# EAGLE board Wifi Schemati (EAGLE 9.2.2)
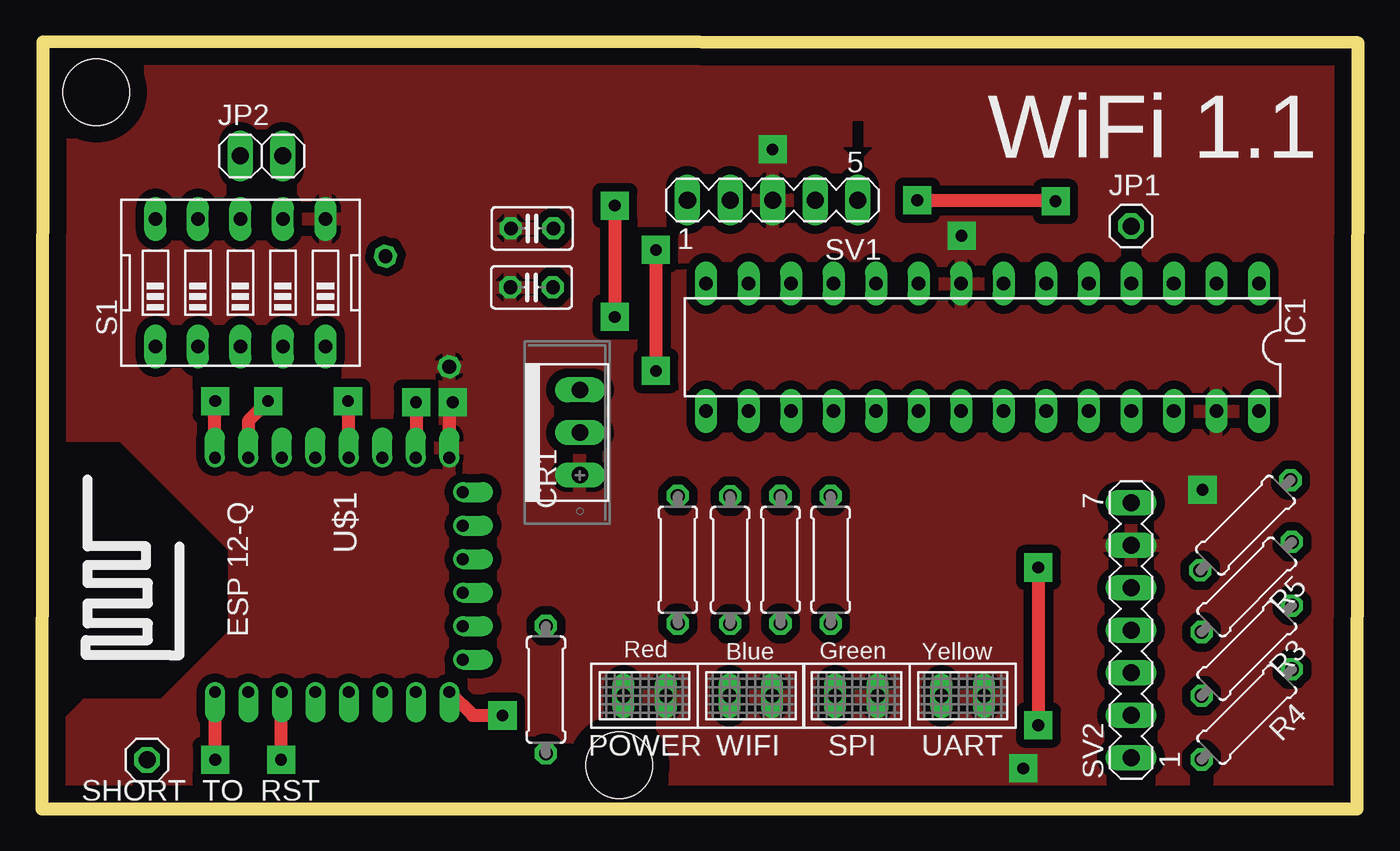
[diagram p0: board, top side]
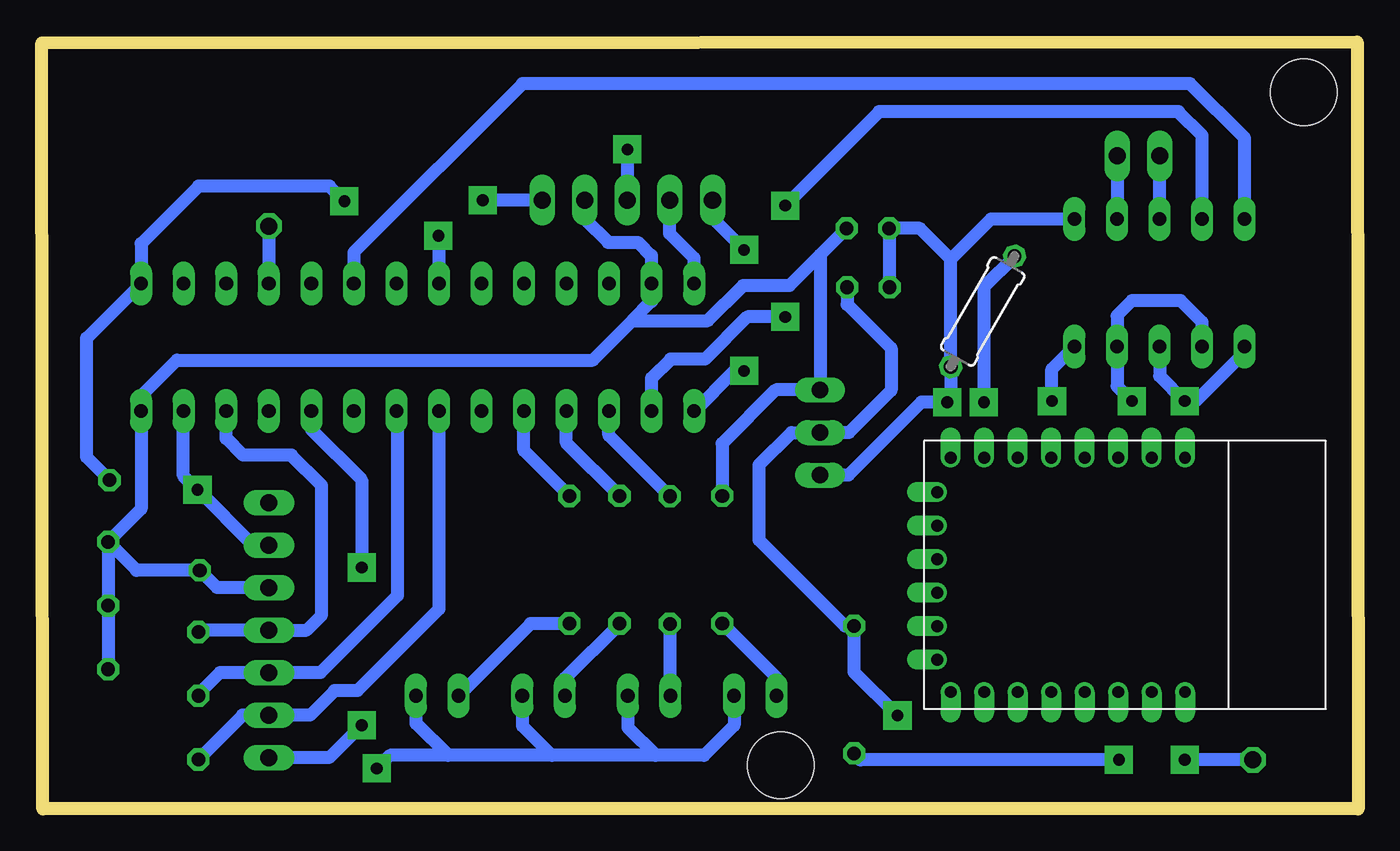
[diagram p1: board, bottom side, seen from below]

Size 78.61 x 45.81 mm. Coordinates in mm from the lower left corner, seen from the top.
Outline: 0,0 78.55,0 78.61,45.75 0.06,45.81 0,0
Copper layers (1*16): Top 0.035mm / dielectric 1.5mm / Bottom 0.035mm
Design rules "default *": minimum track width 10mil, minimum drill 22mm, track to track 20mil, track to pad 20mil, pad to pad 20mil, via to via 20mil, smd to smd 8mil, copper to edge 40mil, drill to drill 8mil, minimum pad ring 10mil, minimum via ring 8mil, stop-mask expansion 4mil, vias tented up to drill 0mil, thermal gap 10mil
Holes 3.97 mm at 3.25,42.81 34.48,2.61

## Footprints (pad centres in the part's own frame; a part is rotated, then mirrored left to right if it is on the bottom)
0207/7 = drill 0.813 octagon: 1 -3.81,0; 2 3.81,0
C025-025X050 = drill 0.813 octagon: 1 -1.27,0; 2 1.27,0
TO-220 = drill 1 long: 1 -5.08,-1.524; 2 -2.54,-1.524; 3 0,-1.524
DIL28-3 = drill 0.813 long: 1 -16.51,-3.81; 2 -13.97,-3.81; 3 -11.43,-3.81; 4 -8.89,-3.81; 5 -6.35,-3.81; 6 -3.81,-3.81; 7 -1.27,-3.81; 8 1.27,-3.81; 9 3.81,-3.81; 10 6.35,-3.81; 11 8.89,-3.81; 12 11.43,-3.81; 13 13.97,-3.81; 14 16.51,-3.81; 15 16.51,3.81; 16 13.97,3.81; 17 11.43,3.81; 18 8.89,3.81; 19 6.35,3.81; 20 3.81,3.81; 21 1.27,3.81; 22 -1.27,3.81; 23 -3.81,3.81; 24 -6.35,3.81; 25 -8.89,3.81; 26 -11.43,3.81; 27 -13.97,3.81; 28 -16.51,3.81
1X01 = drill 1.016 octagon: 1 0,0
1X02 = drill 1.016 long: 1 -1.27,0; 2 1.27,0
U57X32 = drill 0.813 long: A -1.27,0; K 1.27,0
EDG-05 = drill 0.813 long: 1 -5.08,-3.81; 2 -2.54,-3.81; 3 0,-3.81; 4 2.54,-3.81; 5 5.08,-3.81; 6 5.08,3.81; 7 2.54,3.81; 8 0,3.81; 9 -2.54,3.81; 10 -5.08,3.81
MA05-1 = drill 1.016 long: 1 -5.08,0; 2 -2.54,0; 3 0,0; 4 2.54,0; 5 5.08,0
MA07-1 = drill 1.016 long: 1 -7.62,0; 2 -5.08,0; 3 -2.54,0; 4 0,0; 5 2.54,0; 6 5.08,0; 7 7.62,0
ESP12Q = drill 0.7 offset: ADC -7.1,3.8; CH_PD -7.1,1.8; CS0 -5.165,-9.005; GND 6.9,-8.2; GPIO0 6.9,-2.2; GPIO2 6.9,-4.2; GPIO4 6.9,1.8; GPIO5 6.9,-0.2; GPIO9 -1.165,-9.005; GPIO10 0.835,-9.005; GPIO12 -7.1,-4.2; GPIO13 -7.1,-6.2; GPIO14 -7.1,-2.2; GPIO15 6.9,-6.2; GPIO16 -7.1,-0.2; MISO -3.165,-9.005; MOSI 2.835,-9.005; RESET -7.1,5.8; RX 6.9,3.8; SCLK 4.835,-9.005; TX 6.9,5.8; VCC -7.1,-8.2

## Placement (x,y rotation side)
BLUE_WIFI  330  [0207/7]  41.1,14.86 270 top
C1  10uF  [C025-025X050]  29.28,34.67 180 top
C2  10uF  [C025-025X050]  29.25,31.15 0 top
CR1  LD1117V33  [TO-220]  30.61,25.02 90 top
GREEN_SPI  330  [0207/7]  44.11,14.88 270 top
IC1  PIC24FVXXKA302-SP  [DIL28-3]  56.17,27.56 180 top
JP1  [1X01]  65.06,34.81 0 top
JP2  [1X02]  13.12,39 0 top
POWER  U57X32  [U57X32]  36,6.76 0 top
R1  10K  [0207/7]  71.88,16.94 225 top
R2  10K  [0207/7]  22.43,29.71 60 bottom
R3  10K  [0207/7]  71.96,9.45 225 top
R4  10K  [0207/7]  71.96,5.64 225 top
R5  10K  [0207/7]  71.96,13.26 225 top
R6  10K  [0207/7]  30.11,7.12 90 top
RED_POWER  330  [0207/7]  37.98,14.89 90 top
S1  [EDG-05]  11.86,31.42 0 top
SHORT_TO_RST  [1X01]  6.29,2.94 0 top
SPI  U57X32  [U57X32]  48.65,6.76 0 top
SV1  [MA05-1]  43.64,36.35 0 top
SV2  [MA07-1]  65.06,10.68 90 top
U$1  ESP12Q  [ESP12Q]  16.13,14.08 90 top
UART  U57X32  [U57X32]  55,6.76 0 top
WIFI  U57X32  [U57X32]  42.35,6.76 0 top
YELLOW_UART  330  [0207/7]  47.11,14.88 270 top

## Library data of the parts
BLUE_WIFI GREEN_SPI R1-R6 RED_POWER YELLOW_UART = rcl; SPICEPREFIX: R
C1 C2 = rcl; SPICEPREFIX: C
CR1 = 3v3 Regulator; MANUFACTURER_PART_NUMBER: LD1117V33; VENDOR: STMicroelectronics
IC1 = pic24kakl
JP1 JP2 SHORT_TO_RST = pinhead
POWER SPI UART WIFI = led
S1 = special
SV1 SV2 = con-lstb; OC_FARNELL: unknown; OC_NEWARK: unknown
U$1 = esp826612q; SPICEPREFIX: X

## Nets
3.3V: C2.2 CR1.2 R6.2 U$1.VCC
+12V: SV2.7
CLK: IC1.22 R3.2 SV2.3
FLSH_MD: S1.5 U$1.GPIO0
GND: C1.2 C2.1 CR1.1 IC1.8 IC1.27 POWER.K R2.1 S1.6 SPI.K SV1.3 SV2.6 U$1.GND UART.K WIFI.K
MCLR: IC1.1 R1.1 SV1.5
MISO: IC1.24 SV2.1
MOSI: IC1.21 R4.2 SV2.2
N$1: SHORT_TO_RST.1 U$1.RESET
N$2: R2.2 U$1.GPIO15
N$6: R6.1 U$1.CH_PD
N$7: POWER.A RED_POWER.1
N$8: GREEN_SPI.2 SPI.A
N$10: UART.A YELLOW_UART.2
N$11: BLUE_WIFI.2 WIFI.A
PGC: IC1.15 SV1.1
PGD: IC1.14 SV1.2
RX: S1.2 S1.4 U$1.RX
RXPIC: IC1.6 S1.10
RXPROG: JP2.2 S1.7
SPI_LIGHT: GREEN_SPI.1 IC1.18
SS: IC1.26 R5.2 SV2.4
TX: S1.1 S1.3 U$1.TX
TXOUT: IC1.4 JP1.1
TXPIC: IC1.16 S1.9
TXPROG: JP2.1 S1.8
UART_LIGHT: IC1.19 YELLOW_UART.1
VDD: C1.1 CR1.3 IC1.13 IC1.28 R1.2 R3.1 R4.1 R5.1 RED_POWER.2 SV1.4 SV2.5
WIFI_LIGHT: BLUE_WIFI.1 IC1.17

## Tracks (layer width: path | path; a pad name or v marks a point on that pad's centre or on a via)
3.3V  (via drill 0.7 pad 1.68)
  Top 0.762: U$1.VCC 25.73,5.58 v27.51,5.58
  Bottom 0.762: C2.2 30.52,30.13 27.9,27.52 27.9,25 30.42,22.48 CR1.2 33.84,22.48 35.77,20.55 35.77,16.05 30.66,10.93 R6.2 30.11,8.17 v27.51,5.58
CLK
  Bottom 0.762: IC1.22 57.38,23.69 57.38,12.74 61.99,8.14 SV2.3 67.98,8.14 69.27,6.85 R3.2
FLSH_MD  (via drill 0.7 pad 1.68)
  Top 0.762: v18.29,24.35 18.29,21.03 U$1.GPIO0
  Bottom 0.762: v18.29,24.35 18.29,26.27 S1.5
GND  (via drill 0.7 pad 1.68)
  Top 0.762: v24.54,24.29 24.33,24.08 U$1.GND
  Bottom 0.762: 24.33,32.82 R2.1 24.33,24.5 v24.54,24.29 26.09,24.29 30.44,19.94 CR1.1 | S1.6 21.92,35.23 24.33,32.82 | 24.33,32.82 26.18,34.67 C1.2 27.98,34.64 C2.1 | v43.64,39.39 SV1.3 | POWER.K 37.27,4.98 39.06,3.19 41.96,3.19 | 41.96,3.19 48.16,3.19 | 48.16,3.19 54.35,3.19 | UART.K 56.27,5.11 54.35,3.19 | SPI.K 49.92,4.96 48.16,3.19 | WIFI.K 43.62,4.85 41.96,3.19 | 54.35,3.19 57.83,3.19 v58.61,2.42 | IC1.27 70.16,19.9 v69.32,19.06 66.01,15.76 SV2.6 | v54.93,34.23 54.9,34.2 IC1.8
  pour Top: 0.35,45.71 78.54,45.71 78.54,0.03 0.09,0.03 0.09,3.64 2.67,6.23 7.25,6.23 11.51,10.48 11.51,15.58 4.8,22.29 0.35,22.29
MCLR  (via drill 0.7 pad 1.68)
  Top 0.762: v52.29,36.35 60.48,36.35 v60.54,36.29
  Bottom 0.762: SV1.5 | SV1.5 v52.29,36.35 | v60.54,36.29 61.45,37.19 69.25,37.19 72.68,33.76 IC1.1 75.95,28.11 75.95,21.01 R1.1
MISO  (via drill 0.7 pad 1.68)
  Top 0.762: v59.51,14.42 v59.51,5
  Bottom 0.762: IC1.24 62.52,22.66 59.51,19.64 v59.51,14.42 | 59.93,4.59 v59.51,5 61.45,3.06 SV2.1
MOSI
  Bottom 0.762: IC1.21 54.9,11.93 59.77,7.06 61.12,7.06 62.59,5.6 SV2.2 66.62,5.6 R4.2
N$1  (via drill 0.7 pad 1.68)
  Top 0.762: U$1.RESET 10.33,2.95 v10.35,2.94
  Bottom 0.762: SHORT_TO_RST.1 v10.35,2.94
N$2  (via drill 0.7 pad 1.68)
  Top 0.762: v22.35,24.29 22.35,21 U$1.GPIO15
  Bottom 0.762: R2.2 22.35,31.18 v22.35,24.29
N$6  (via drill 0.7 pad 1.68)
  Top 0.762: v14.29,2.94 14.29,6.93 U$1.CH_PD
  Bottom 0.762: v14.29,2.94 29.73,2.94 R6.1
N$7
  Bottom 0.762: RED_POWER.1 34.73,7.83 POWER.A
N$8
  Bottom 0.762: GREEN_SPI.2 47.38,7.81 SPI.A
N$9
  cutout Top: 48.74,38.61 49.51,39.45 49,39.45 49,41 48.48,41 48.48,39.45 47.96,39.45
N$10
  Bottom 0.762: YELLOW_UART.2 49.42,11.07 UART.A
N$11
  Bottom 0.762: BLUE_WIFI.2 41.1,6.78 WIFI.A
PGC  (via drill 0.7 pad 1.68)
  Top 0.762: v36.67,33.39 | v36.67,33.39 v36.67,26.16
  Bottom 0.762: v36.67,33.39 38.56,35.27 SV1.1 | IC1.15 37.26,26.16 v36.67,26.16
PGD
  Bottom 0.762: SV1.2 41.12,36.33 41.12,34.35 39.66,32.89 IC1.14
RX  (via drill 0.7 pad 1.68)
  Top 0.762: v13.51,24.35 12.33,23.18 U$1.RX
  Bottom 0.762: v13.51,24.35 14.4,25.24 S1.4 14.4,29.44 14.41,29.45 13.51,30.35 10.61,30.35 9.32,29.07 S1.2
RXPIC
  Bottom 0.762: S1.10 6.78,40.08 10.03,43.32 49.9,43.32 59.98,33.24 IC1.6
RXPROG
  Bottom 0.762: JP2.2 S1.7
SPI_LIGHT
  Bottom 0.762: GREEN_SPI.1 47.28,21.86 IC1.18
SS
  Bottom 0.762: R5.2 69.16,10.68 SV2.4 62.8,10.68 61.9,11.58 61.9,19.32 63.7,21.13 66.61,21.13 67.6,22.12 IC1.26
TX  (via drill 0.7 pad 1.68)
  Top 0.762: U$1.TX 10.33,24.34 v10.35,24.35
  Bottom 0.762: S1.1 6.78,27.28 9.7,24.35 v10.35,24.35 11.86,25.86 S1.3
TXOUT
  Bottom 0.762: JP1.1 IC1.4
TXPIC  (via drill 0.7 pad 1.68)
  Top 0.762: v34.22,36.03 v34.22,29.39
  Bottom 0.762: S1.9 9.32,40.23 10.74,41.64 28.61,41.64 v34.22,36.03 | v34.22,29.39 36.48,29.39 39,26.87 41.06,26.87 42.2,25.73 IC1.16
TXPROG
  Bottom 0.762: S1.8 JP2.1
UART_LIGHT
  Bottom 0.762: YELLOW_UART.1 49.82,21.41 IC1.19
VDD
  Bottom 0.762: RED_POWER.2 37.98,21.82 34.78,25.02 CR1.3 32.14,33.09 | C1.1 32.14,33.09 | 32.14,33.09 33.97,31.26 36.74,31.26 38.83,29.16 43.35,29.16 | SV1.4 46.18,35.22 44.8,33.84 43,33.84 42.2,33.05 IC1.13 42.2,30.31 43.35,29.16 | 43.35,29.16 45.7,26.81 70.54,26.81 72.68,24.67 IC1.28 72.68,17.92 R5.1 | 69.14,14.3 R1.2 | R1.2 72.95,14.25 R5.1 | R5.1 R3.1 | R3.1 | R3.1 R4.1 | R4.1 | SV2.5 68.15,13.22 R1.2
WIFI_LIGHT
  Bottom 0.762: BLUE_WIFI.1 44.74,22.31 IC1.17

## Text on the board
tNames: WiFi 1.1 | Red | Blue | Green | Yellow